# Altium PCB 下板2020-03-20.PCBDOC
Units mm, origin at the board's own origin, x right, y up, seen from the top; angles counter-clockwise.
Board outline 266 x 45 mm, 2 copper layers (Top Layer, Bottom Layer); 7 components, 81 nets, 242 pads, 0 vias.
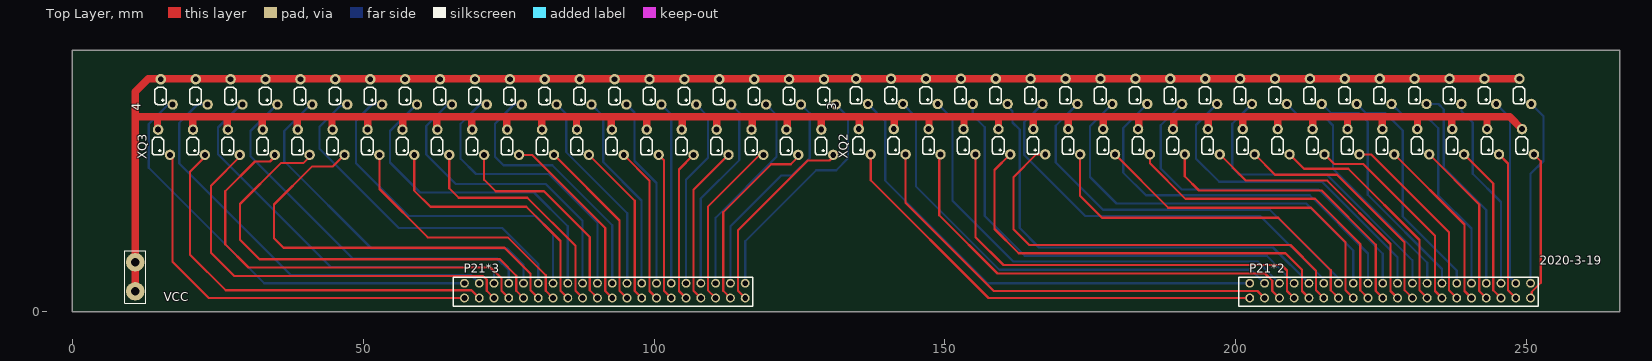
[diagram p0: Top Layer view]
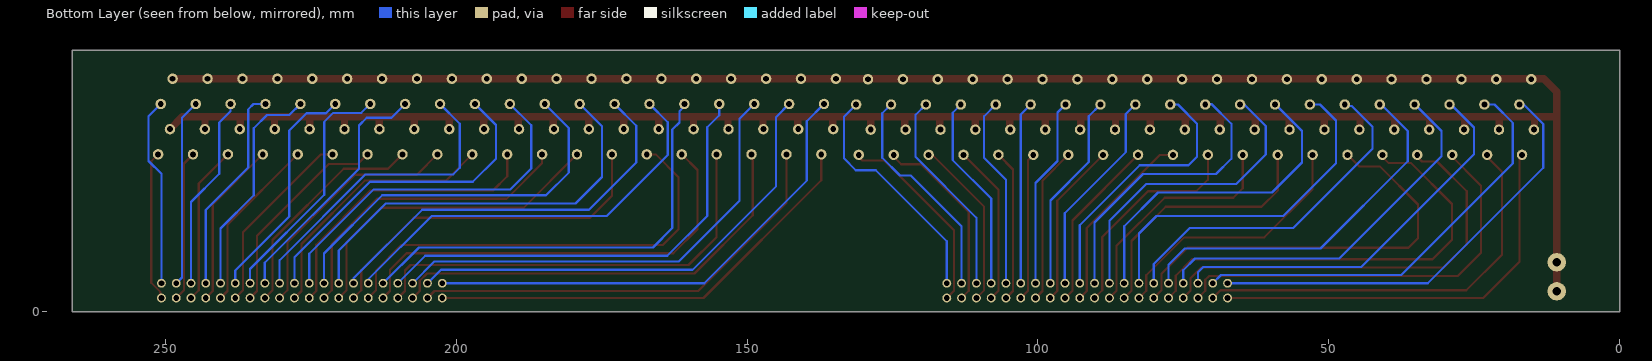
[diagram p1: Bottom Layer view, seen from below]

## Layer stack, top to bottom
Top Solder: solder mask 0.0102, Solder Resist, Dk 3.5
Top Layer: signal copper 0.0356
Dielectric1: dielectric 0.32, FR-4, Dk 4.8
Bottom Layer: signal copper 0.0356
Bottom Solder: solder mask 0.0102, Solder Resist, Dk 3.5

## Board outline
0,0 0,45 266,45 266,0

## Design rules (kind name [scope] priority, off if disabled: settings)
Clearance [All] p1: gap=0.254 ignorepadtopadclearanceinfootprint=FALSE
FabricationTestPointUsage TestPointUsage [All] p1: valid=0 allowmultiple=FALSE
FabricationTestpoint Testpoint [All] p1: side=3 testpointundercomponent=TRUE minsize=1.016 maxsize=2.54 preferedsize=1.524 minholesize=0 maxholesize=1.016 preferedholesize=0.813 testpointgrid=0.025 allowsidetop=TRUE allowsidebottom=TRUE usegrid=TRUE gridtolerance=0
PolygonConnect [All] p1: connectstyle=Relief reliefconductorwidth=0.254 reliefentries=4 polygonreliefangle="90 Angle" airgapwidth=0.254
RoutingVias [All] p1: holewidth=0.8 width=1.6 viastyle="Through Hole" minholewidth=0.711 minwidth=1.27 maxholewidth=0.711 maxwidth=1.27
SilkToSolderMaskClearance SilkscreenOverComponentPads [IsPad] p1: minsilkscreentomaskgap=0.254 clearancetoexposedcopper=TRUE
SolderMaskExpansion [All] p1: expansion=0.102
Width [All] p1: maxlimit=1.27 minlimit=0.254 preferedwidth=0.381 minimp=50.000000 maximp=50.000000 favimp=50.000000
27 further rules are at their usual default settings.

## Classes and differential pairs
component class 盲文原理图1: 1 3 P21*2 XQ2

## Components (designator, comment, footprint, x,y, rotation, side; value= is the part's Value field where it differs from the comment)
3 "Header 20X2" XIANQUAN1 250.769,35.75 r180 top (schematic designator XQ1)
4 "Header 20X2" XIANQUAN1 131.25,35.66 r180 top (schematic designator XQ1)
P21*2 "Header 21X2" XINPIAN 200.5,1 r180 top
P21*3 "Header 21X2" XINPIAN 65.5,1 r180 top (schematic designator P21*2)
XQ2 "Header 20X2" XIANQUAN1 251.229,27.09 r180 top
XQ3 "Header 20X2" XIANQUAN1 130.79,27 r180 top (schematic designator XQ2)
? "" N1A 9,1.5 r0 top

## Footprints (in the part's own frame and the unit in brackets; to place one, negate y for a bottom-side part, rotate by r counter-clockwise, add the part's x,y. Pads: shape width x height; smd on the part's side, far side on the other; paste and mask are expansions set on the pad)
N1A [mm]
  round 3.175 hole 1.5: 1(1.825,2.05) 2(1.825,7.05)
  silkscreen extent 0,0 3.65,9
XIANQUAN1 [mm]
  round 1.8 hole 1: 1(2.04,-4.34) 2(0,0) 3(8.04,-4.34) 4(6,0) 5(14.04,-4.34) 6(12,0) 7(20.04,-4.34) 8(18,0) 9(26.04,-4.34) 10(24,0) 11(32.04,-4.34) 12(30,0) 13(38.04,-4.34) 14(36,0) 15(44.04,-4.34) 16(42,0) 17(50.04,-4.34) 18(48,0) 19(56.04,-4.34) 20(54,0) 21(62.04,-4.34) 22(60,0) 23(68.04,-4.34) 24(66,0) 25(74.04,-4.34) 26(72,0) 27(80.04,-4.34) 28(78,0) 29(86.04,-4.34) 30(84,0) 31(92.04,-4.34) 32(90,0) 33(98.04,-4.34) 34(96,0) 35(104.04,-4.34) 36(102,0) 37(110.04,-4.34) 38(108,0) 39(116.04,-4.34) 40(114,0)
  silkscreen extent 1.08,-3 117.08,0
XINPIAN [mm]
  round 1.524 hole 1: 1(-1.9,-3.94) 2(-4.44,-3.94) 3(-6.98,-3.94) 4(-9.52,-3.94) 5(-12.06,-3.94) 6(-14.6,-3.94) 7(-17.14,-3.94) 8(-19.68,-3.94) 9(-22.22,-3.94) 10(-24.76,-3.94) 11(-27.3,-3.94) 12(-29.84,-3.94) 13(-32.38,-3.94) 14(-34.92,-3.94) 15(-37.46,-3.94) 16(-40,-3.94) 17(-42.54,-3.94) 18(-45.08,-3.94) 19(-47.62,-3.94) 20(-50.16,-3.94) 21(-50.16,-1.4) 22(-47.62,-1.4) 23(-45.08,-1.4) 24(-42.54,-1.4) 25(-40,-1.4) 26(-37.46,-1.4) 27(-34.92,-1.4) 28(-32.38,-1.4) 29(-29.84,-1.4) 30(-27.3,-1.4) 31(-24.76,-1.4) 32(-22.22,-1.4) 33(-19.68,-1.4) 34(-17.14,-1.4) 35(-14.6,-1.4) 36(-12.06,-1.4) 37(-9.52,-1.4) 38(-6.98,-1.4) 39(-4.44,-1.4) 40(-1.9,-1.4)
  silkscreen extent -51.5,-5 0,0

## Part data
3 4 XQ2 XQ3: "Header, 20-Pin, Dual row"
P21*2 P21*3: library part "Header 22X2", "Header, 22-Pin, Dual row"

## Nets (pads, with @x,y where several pads share a name; then routed paths per layer and width w, separated by ;. In a path a pad name is that pad's centre, name@x,y a point inside that pad or via, vN(x,y) a via of type N, cw(c..) or ccw(c..) an arc to the next point about the centre after c; other vN are vias at no path point)
GND: 3.1 3.3 3.5 3.7 3.9 3.11 3.13 3.15 3.17 3.19 3.21 3.23 3.25 3.27 3.29 3.31 3.33 3.35 3.37 3.39 4.1 4.3 4.5 4.7 4.9 4.11 4.13 4.15 4.17 4.19 4.21 4.23 4.25 4.27 4.29 4.31 4.33 4.35 4.37 4.39 ?.1 ?.2 XQ2.1 XQ2.3 XQ2.5 XQ2.7 XQ2.9 XQ2.11 XQ2.13 XQ2.15 XQ2.17 XQ2.19 XQ2.21 XQ2.23 XQ2.25 XQ2.27 XQ2.29 XQ2.31 XQ2.33 XQ2.35 XQ2.37 XQ2.39 XQ3.1 XQ3.3 XQ3.5 XQ3.7 XQ3.9 XQ3.11 XQ3.13 XQ3.15 XQ3.17 XQ3.19 XQ3.21 XQ3.23 XQ3.25 XQ3.27 XQ3.29 XQ3.31 XQ3.33 XQ3.35 XQ3.37 XQ3.39 | length 598.3
  Top Layer w1.27: ?.1 ?.2 10.825,33.2 ; XQ3.39 14.649,31.441 14.649,33.55 ; XQ3.37 20.675,31.415 20.675,33.55 ; XQ3.35 26.649,31.441 26.649,33.501 26.6,33.55 ; XQ3.33 32.649,31.441 32.649,33.326 32.425,33.55 ; XQ3.31 38.649,31.441 38.649,33.501 38.6,33.55 ; XQ3.29 44.649,31.441 44.649,33.426 44.525,33.55 ; XQ3.27 50.775,31.365 50.775,33.55 ; XQ3.25 56.8,31.39 56.8,33.55 ; XQ3.23 62.649,31.441 62.649,33.451 62.55,33.55 ; XQ3.21 68.65,31.44 68.65,33.55 ; XQ3.19 74.649,31.441 74.649,33.301 74.4,33.55 ; XQ3.17 80.7,31.39 80.7,33.55 ; XQ3.15 86.675,31.415 86.675,33.55 ; XQ3.13 92.649,31.441 92.649,33.501 92.6,33.55 ; XQ3.11 98.75,33.55 ; XQ3.9 104.852,31.441 104.852,33.477 104.925,33.55 ; XQ3.7 110.75,33.55 ; XQ3.5 116.852,31.441 116.852,33.55 ; XQ3.3 122.875,31.465 122.875,33.55 ; 128.675,33.55 122.875,33.55 ; XQ3.1 128.75,33.55 135.275,33.55 ; XQ2.39 135.275,31.516 135.275,33.55 ; XQ2.37 141.275,31.516 141.275,33.55 ; XQ2.35 147.25,31.491 147.25,33.55 ; XQ2.33 153.275,31.516 153.275,33.55 ; XQ2.31 159.2,31.441 159.2,33.55 ; XQ2.29 165.189,33.514 165.225,33.55 ; XQ2.27 171.189,33.536 171.175,33.55 ; XQ2.25 177.189,33.539 177.2,33.55 ; XQ2.23 183.3,31.541 183.3,33.55 ; XQ2.21 189.325,31.566 189.325,33.55 ; XQ2.19 195.25,31.491 195.25,33.55 ; XQ2.17 201.2,31.441 201.2,33.55 ; XQ2.15 207.189,33.511 207.15,33.55 ; XQ2.13 213.189,33.536 213.175,33.55 ; XQ2.11 219.189,33.514 219.225,33.55 ; XQ2.9 225.189,33.536 225.175,33.55 ; XQ2.7 231.225,31.466 231.225,33.55 ; XQ2.5 237.125,31.494 237.125,33.55 ; XQ2.3 243.175,31.444 243.175,33.55 ; 3.1 3.3 3.5 3.7 3.9 3.11 3.13 3.15 3.17 3.19 3.21 3.23 3.25 3.27 3.29 3.31 3.33 3.35 3.37 3.39 129.21,40.09 123.21,40.09 117.21,40.09 111.21,40.09 105.21,40.09 99.21,40.09 93.21,40.09 87.21,40.09 81.21,40.09 75.21,40.09 69.21,40.09 63.21,40.09 57.21,40.09 51.21,40.09 45.21,40.09 39.21,40.09 33.21,40.09 27.21,40.09 21.21,40.09 15.21,40.09 13.04,40.09 10.825,37.875 10.825,33.2 ; XQ2.1 247.069,33.55 243.175,33.55 ; 10.825,33.2 11.175,33.55 14.649,33.55 ; 14.649,33.55 20.675,33.55 ; 20.675,33.55 26.6,33.55 ; 26.6,33.55 32.425,33.55 ; 32.425,33.55 38.6,33.55 ; 38.6,33.55 44.525,33.55 ; 44.525,33.55 50.775,33.55 ; 50.775,33.55 56.8,33.55 ; 56.8,33.55 62.55,33.55 ; 62.55,33.55 68.65,33.55 ; 68.65,33.55 74.4,33.55 ; 74.4,33.55 80.7,33.55 ; 80.7,33.55 86.675,33.55 ; 86.675,33.55 92.6,33.55 ; 92.6,33.55 98.75,33.55 ; 98.75,33.55 104.925,33.55 ; 104.925,33.55 110.75,33.55 ; 110.75,33.55 116.852,33.55 ; 116.852,33.55 122.875,33.55 ; 135.275,33.55 141.275,33.55 ; 141.275,33.55 147.25,33.55 ; 147.25,33.55 153.275,33.55 ; 153.275,33.55 159.2,33.55 ; 159.2,33.55 165.225,33.55 ; 165.225,33.55 171.175,33.55 ; 171.175,33.55 177.2,33.55 ; 177.2,33.55 183.3,33.55 ; 183.3,33.55 189.325,33.55 ; 189.325,33.55 195.25,33.55 ; 195.25,33.55 201.2,33.55 ; 201.2,33.55 207.15,33.55 ; 207.15,33.55 213.175,33.55 ; 213.175,33.55 219.225,33.55 ; 219.225,33.55 225.175,33.55 ; 225.175,33.55 231.225,33.55 ; 231.225,33.55 237.125,33.55 ; 237.125,33.55 243.175,33.55
XQ1_1: 4.2 P21*3.20 | length 40.9
  Bottom Layer w0.381: P21*3.20 115.66,12.16 127.875,24.375 131.325,24.375 133.35,26.4 133.35,33.56 4.2
XQ1_2: 4.4 P21*3.19 | length 38.1
  Bottom Layer w0.381: P21*3.19 113.12,14.72 121.875,23.475 123.725,23.475 126.75,26.5 126.75,34.16 4.4
XQ1_3: 4.6 P21*3.18 | length 35.8
  Bottom Layer w0.381: P21*3.18 110.58,16.205 121.025,26.65 121.025,33.885 4.6
XQ1_4: 4.8 P21*3.17 | length 34
  Bottom Layer w0.381: P21*3.17 108.04,19.49 114.65,26.1 114.65,34.26 4.8
XQ1_5: 4.10 P21*3.16 | length 33.1
  Bottom Layer w0.381: P21*3.16 105.5,22.725 109.25,26.475 109.25,33.66 4.10
XQ1_6: 4.12 P21*3.15 | length 31.4
  Bottom Layer w0.381: 4.12 102.96,33.95 P21*3.15
XQ1_7: 4.14 P21*3.14 | length 32.9
  Bottom Layer w0.381: 4.14 96.625,34.285 96.625,25.95 100.42,22.155 P21*3.14
XQ1_8: 4.16 P21*3.13 | length 34.3
  Bottom Layer w0.381: 4.16 91.25,33.66 91.25,25.775 97.85,19.175 97.85,4.97 P21*3.13
XQ1_9: 4.18 P21*3.12 | length 35.8
  Bottom Layer w0.381: 4.18 84.9,34.01 84.9,27.475 95.4,16.975 95.4,5 P21*3.12
XQ1_10: 4.20 P21*3.11 | length 46.6
  Bottom Layer w0.381: 4.20 75.935,35.66 72.65,32.375 72.65,26.7 74.125,25.225 82.5,25.225 92.8,14.925 P21*3.11
XQ1_11: 4.22 P21*3.10 | length 49.9
  Bottom Layer w0.381: 4.22@70.769,35.75 70.15,35.75 66.75,32.35 66.75,26.325 69.375,23.7 81.95,23.7 90.26,15.39 P21*3.10
XQ1_12: 4.24 P21*3.9 | length 53.1
  Bottom Layer w0.381: 4.24 64.56,35.66 60.85,31.95 60.85,27.05 65.9,22 81.375,22 87.72,15.655 P21*3.9
XQ1_13: 4.26 P21*3.8 | length 56.8
  Bottom Layer w0.381: 4.26 59.169,35.66 54.625,31.116 54.625,25.675 59.75,20.55 79.375,20.55 85.18,14.745 P21*3.8
XQ1_14: 4.28 P21*3.7 | length 60.4
  Bottom Layer w0.381: 4.28 51.51,35.66 48.775,32.925 48.775,25.575 57.85,16.5 79.625,16.5 82.64,13.485 P21*3.7
XQ1_15: 4.30 P21*3.6 | length 59.3
  Bottom Layer w0.381: 4.30 46.979,35.388 46.038,35.388 42.475,31.825 42.475,28.075 56.1,14.45 73.9,14.45 80.1,8.25 P21*3.6
XQ1_16: 4.32 P21*3.5 | length 63.6
  Bottom Layer w0.381: 4.32 40.985,35.66 36.425,31.1 36.425,25.925 51.425,10.925 74.775,10.925 77.56,8.14 P21*3.5
XQ1_17: 4.34 P21*3.4 | length 65.6
  Bottom Layer w0.381: 4.34 35.169,35.66 30.625,31.116 30.625,26.75 48.2,9.175 73,9.175 75.02,7.155 P21*3.4
XQ1_18: 4.36 P21*3.3 | length 68.2
  Bottom Layer w0.381: 4.36 29.01,35.66 25.05,31.7 25.05,27.1 44.425,7.725 71.6,7.725 72.48,6.845 P21*3.3
XQ1_19: 4.38 P21*3.2 | length 73.3
  Bottom Layer w0.381: 4.38 21.535,35.66 18.375,32.5 18.375,25.525 37.55,6.35 68.53,6.35 P21*3.2
XQ1_20: 4.40 P21*3.1 | length 75.5
  Bottom Layer w0.381: 4.40 16.485,35.66 13.15,32.325 13.15,24.8 33.01,4.94 P21*3.1
XQ2_1: P21*3.21 XQ3.2 | length 34.4
  Top Layer w0.381: P21*3.21 114.425,3.635 114.425,14.025 126.425,26.025 130.164,26.025 XQ3.2@131.229,27.09
XQ2_2: P21*3.22 XQ3.4 | length 32.7
  Top Layer w0.381: P21*3.22 111.875,3.645 111.875,17.125 120.125,25.375 123.514,25.375 XQ3.4@125.229,27.09
XQ2_3: P21*3.23 XQ3.6 | length 29.5
  Top Layer w0.381: P21*3.23 109.25,3.73 109.25,18.1 118.15,27 XQ3.6
XQ2_4: P21*3.24 XQ3.8 | length 27.6
  Top Layer w0.381: P21*3.24 106.79,3.65 106.79,21 XQ3.8
XQ2_5: P21*3.25 XQ3.10 | length 26.3
  Top Layer w0.381: P21*3.25 104.294,3.607 104.294,24.503 XQ3.10 ; XQ3.10@107.125,26.986 XQ3.10@107.229,27.09
XQ2_6: P21*3.26 XQ3.12 | length 25.5
  Top Layer w0.381: XQ3.12 101.7,26.09 101.7,3.66 P21*3.26
XQ2_7: P21*3.27 XQ3.14 | length 26.9
  Top Layer w0.381: XQ3.14 99.214,22.577 99.214,3.607 P21*3.27
XQ2_8: P21*3.28 XQ3.16 | length 28.4
  Top Layer w0.381: XQ3.16 96.674,19.117 96.674,3.607 P21*3.28
XQ2_9: P21*3.29 XQ3.18 | length 29.8
  Top Layer w0.381: XQ3.18 94.075,15.715 94.075,3.665 P21*3.29
XQ2_10: P21*3.30 XQ3.20 | length 32.5
  Top Layer w0.381: XQ3.20 79.025,27 91.594,14.431 91.594,3.607 P21*3.30
XQ2_11: P21*3.31 XQ3.22 | length 37.5
  Top Layer w0.381: XQ3.22 70.79,22.735 72.775,20.75 81.075,20.75 88.927,12.898 88.927,3.734 P21*3.31
XQ2_12: P21*3.32 XQ3.24 | length 41
  Top Layer w0.381: XQ3.24 64.79,21.26 66.425,19.625 78.225,19.625 86.514,11.336 86.514,3.607 P21*3.32
XQ2_13: P21*3.33 XQ3.26 | length 45.2
  Top Layer w0.381: XQ3.26 58.79,20.86 61.575,18.075 78.025,18.075 83.914,12.186 83.914,3.666 P21*3.33
XQ2_14: P21*3.34 XQ3.28 | length 45
  Top Layer w0.381: XQ3.28 52.79,21.135 61.1,12.825 74.85,12.825 81.374,6.301 81.374,3.666 P21*3.34
XQ2_15: P21*3.35 XQ3.30 | length 72.8
  Top Layer w0.381: XQ3.30 44.815,25.025 41.225,25.025 34.675,18.475 34.675,12.65 36.3,11.025 74.3,11.025 78.775,6.55 78.775,3.725 P21*3.35
XQ2_16: P21*3.36 XQ3.32 | length 76.5
  Top Layer w0.381: XQ3.32@41.229,27.09 39.764,25.625 35.9,25.625 28.825,18.55 28.825,12.4 32.175,9.05 73.5,9.05 76.308,6.242 76.308,3.652 P21*3.36
XQ2_17: P21*3.37 XQ3.34 | length 74.5
  Top Layer w0.381: XQ3.34@35.229,27.09 33.989,25.85 31.4,25.85 26.3,20.75 26.3,11.65 30.3,7.65 71.9,7.65 73.775,5.775 73.775,3.645 P21*3.37
XQ2_18: P21*3.38 XQ3.36 | length 72.1
  Top Layer w0.381: XQ3.36@29.229,27.09 23.85,21.711 23.85,10.2 27.85,6.2 70.575,6.2 71.229,5.546 71.229,3.651 P21*3.38
XQ2_19: P21*3.39 XQ3.38 | length 71.2
  Top Layer w0.381: XQ3.38@23.229,27.09 20.25,24.111 20.25,9.85 26.375,3.725 68.615,3.725 P21*3.39
XQ2_20: P21*3.40 XQ3.40 | length 71.2
  Top Layer w0.381: XQ3.40@17.229,27.09 17.229,8.646 23.475,2.4 P21*3.40
XQ3_1: P21*2.21 XQ2.2 | length 25.9
  Top Layer w0.381: P21*2.21 250.879,2.619 250.879,3.452 252.425,4.999 252.425,25.894 XQ2.2
XQ3_2: P21*2.22 XQ2.4 | length 25.9
  Top Layer w0.381: XQ2.4 246.787,25.533 246.787,3.734 P21*2.22
XQ3_3: P21*2.23 XQ2.6 | length 27.3
  Top Layer w0.381: XQ2.6 244.25,22.069 244.25,3.73 P21*2.23
XQ3_4: P21*2.24 XQ2.8 | length 28.8
  Top Layer w0.381: XQ2.8 241.834,18.486 241.834,3.607 P21*2.24
XQ3_5: P21*2.25 XQ2.10 | length 30.2
  Top Layer w0.381: XQ2.10 239.294,15.026 239.294,3.607 P21*2.25
XQ3_6: P21*2.26 XQ2.12 | length 32.8
  Top Layer w0.381: XQ2.12 223.235,27.09 236.627,13.698 236.627,3.734 P21*2.26
XQ3_7: P21*2.27 XQ2.14 | length 36
  Top Layer w0.381: XQ2.14 216.894,25.425 221.875,25.425 234.214,13.086 234.214,3.607 P21*2.27
XQ3_8: P21*2.28 XQ2.16 | length 38.9
  Top Layer w0.381: XQ2.16 211.719,24.6 219.325,24.6 231.55,12.375 231.55,3.73 P21*2.28
XQ3_9: P21*2.29 XQ2.18 | length 42.1
  Top Layer w0.381: XQ2.18 206.744,23.575 217.375,23.575 229.007,11.943 229.007,3.734 P21*2.29
XQ3_10: P21*2.30 XQ2.20 | length 45.5
  Top Layer w0.381: XQ2.20 201.744,22.575 215.7,22.575 226.594,11.681 226.594,3.607 P21*2.30
XQ3_11: P21*2.31 XQ2.22 | length 51.1
  Top Layer w0.381: XQ2.22 191.229,23.321 193.675,20.875 214.75,20.875 224.054,11.571 224.054,3.607 P21*2.31
XQ3_12: P21*2.32 XQ2.24 | length 53.3
  Top Layer w0.381: XQ2.24 185.229,25.546 191.325,19.45 213.625,19.45 221.387,11.688 221.387,3.734 P21*2.32
XQ3_13: P21*2.33 XQ2.26 | length 56
  Top Layer w0.381: XQ2.26 188.394,17.925 212.925,17.925 218.847,12.003 218.847,3.734 P21*2.33
XQ3_14: P21*2.34 XQ2.28 | length 60.8
  Top Layer w0.381: XQ2.28 173.229,19.946 176.975,16.2 207.3,16.2 216.307,7.193 216.307,3.734 P21*2.34
XQ3_15: P21*2.35 XQ2.30 | length 76.2
  Top Layer w0.381: XQ2.30 165.69,27.09 161.775,23.175 161.775,14.198 164.473,11.5 209.375,11.5 213.767,7.108 213.767,3.734 P21*2.35
XQ3_16: P21*2.36 XQ2.32 | length 75
  Top Layer w0.381: XQ2.32 158.525,24.386 158.525,14.25 162.7,10.075 208.525,10.075 211.354,7.247 211.354,3.607 P21*2.36
XQ3_17: P21*2.37 XQ2.34 | length 75.4
  Top Layer w0.381: XQ2.34 155.229,12.896 160.05,8.075 207.85,8.075 208.8,7.125 208.8,3.62 P21*2.37
XQ3_18: P21*2.38 XQ2.36 | length 75.9
  Top Layer w0.381: XQ2.36 149.025,26.886 149.025,16.625 159.025,6.625 205.025,6.625 206.274,5.376 206.274,3.607 P21*2.38
XQ3_19: P21*2.39 XQ2.38 | length 76.8
  Top Layer w0.381: XQ2.38 143.229,18.771 158.393,3.607 203.734,3.607 P21*2.39
XQ3_20: P21*2.40 XQ2.40 | length 78
  Top Layer w0.381: XQ2.40 137.229,22.646 157.475,2.4 P21*2.40
XQ4_1: 3.2 P21*2.20 | length 32.6
  Bottom Layer w0.381: P21*2.20 250.66,23.735 252.875,25.95 252.875,33.644 3.2
XQ4_2: 3.4 P21*2.19 | length 32.2
  Bottom Layer w0.381: 3.4 247.125,33.394 247.125,5.935 P21*2.19
XQ4_3: 3.6 P21*2.18 | length 33.6
  Bottom Layer w0.381: 3.6 238.769,34.506 240.725,32.55 240.725,23.775 245.58,18.92 P21*2.18
XQ4_4: 3.8 P21*2.17 | length 36.3
  Bottom Layer w0.381: 3.8 234.825,35.75 235.75,34.825 235.75,24.832 243.04,17.542 P21*2.17
XQ4_5: 3.10 P21*2.16 | length 38.8
  Bottom Layer w0.381: 3.10 228.669,33.85 232.525,33.85 234.8,31.575 234.8,20.05 240.5,14.35 P21*2.16
XQ4_6: 3.12 P21*2.15 | length 39.9
  Bottom Layer w0.381: 3.12 222.369,34.15 225.725,34.15 228.675,31.2 228.675,16.425 237.96,7.14 P21*2.15
XQ4_7: 3.14 P21*2.14 | length 42.2
  Bottom Layer w0.381: 3.14 216.298,34.221 221.129,34.221 222.675,32.675 222.675,20.125 235.42,7.38 P21*2.14
XQ4_8: 3.16 P21*2.13 | length 43.3
  Bottom Layer w0.381: 3.16 211.119,33.4 215.35,33.4 216.715,32.035 216.715,24.635 232.88,8.47 P21*2.13
XQ4_9: 3.18 P21*2.12 | length 54.2
  Bottom Layer w0.381: 3.18@203.121,35.75 3.18 199.375,32.356 199.375,24.775 200.5,23.65 215.575,23.65 230.34,8.885 P21*2.12
XQ4_10: 3.20 P21*2.11 | length 57
  Bottom Layer w0.381: 3.20 193.15,32.131 193.15,26.35 197.125,22.375 214.825,22.375 227.8,9.4 P21*2.11
XQ4_11: 3.22 P21*2.10 | length 61.9
  Bottom Layer w0.381: 3.22 187.1,32.081 187.1,24.65 190.675,21.075 214.175,21.075 225.26,9.99 P21*2.10
XQ4_12: 3.24 P21*2.9 | length 66.4
  Bottom Layer w0.381: 3.24 180.65,31.631 180.65,23.95 184.55,20.05 212.725,20.05 222.72,10.055 P21*2.9
XQ4_13: 3.26 P21*2.8 | length 70.3
  Bottom Layer w0.381: 3.26 174.919,31.9 174.919,23.206 179.475,18.65 212.1,18.65 220.18,10.57 P21*2.8
XQ4_14: 3.28 P21*2.7 | length 69.3
  Bottom Layer w0.381: 3.28 169.025,32.006 169.025,25.7 177.15,17.575 205.85,17.575 217.64,5.785 P21*2.7
XQ4_15: 3.30 P21*2.6 | length 71.1
  Bottom Layer w0.381: 3.30 163.625,32.606 163.625,26.975 174.1,16.5 204.2,16.5 215.1,5.6 P21*2.6
XQ4_16: 3.32 P21*2.5 | length 75.8
  Bottom Layer w0.381: 3.32 160.769,35.38 161.625,34.525 161.625,32.575 162.85,31.35 162.85,14.425 166.175,11.1 206.4,11.1 P21*2.5
XQ4_17: 3.34 P21*2.4 | length 78.1
  Bottom Layer w0.381: 3.34 154.769,33.831 156.85,31.75 156.85,16.5 163.7,9.65 205.31,9.65 P21*2.4
XQ4_18: 3.36 P21*2.3 | length 79.7
  Bottom Layer w0.381: 3.36 151.3,33.219 151.3,19.125 161.75,8.675 203.745,8.675 P21*2.3
XQ4_19: 3.38 P21*2.2 | length 81.9
  Bottom Layer w0.381: 3.38 145,33.519 145,21.625 159.35,7.275 202.605,7.275 P21*2.2
XQ4_20: 3.40 P21*2.1 | length 84.4
  Bottom Layer w0.381: 3.40 139.725,32.794 139.725,22.575 157.36,4.94 P21*2.1

## Keep-outs
Keep-Out Layer:
  lines w0.254: -0.021,44.899 -0.019,44.9

## Silkscreen, mask and mechanical layers (free items; w line width, h text height)
Top Overlay:
  text "2020-3-19" at 252.25,8.15 h1.52
  text "VCC" at 15.679,1.825 h1.52
Mechanical 1:
  circle w0.254: c213,14 r1.75
  circle w0.254: c188,14 r1.75
  circle w0.254: c142,14 r1.75
  circle w0.254: c133,14 r1.75
  circle w0.254: c260.5,39 r1.5
  circle w0.254: c260.5,33.5 r1.5
  circle w0.254: c260.5,28 r1.5
  circle w0.254: c5.5,28 r1.5
  circle w0.254: c134.75,36 r0.65
  circle w0.254: c191.25,31 r0.65
  circle w0.254: c188.75,36 r0.65
  circle w0.254: c194.75,36 r0.65
  circle w0.254: c197.25,31 r0.65
  circle w0.254: c200.75,36 r0.65
  circle w0.254: c203.25,31 r0.65
  circle w0.254: c206.75,36 r0.65
  circle w0.254: c209.25,31 r0.65
  circle w0.254: c212.75,36 r0.65
  circle w0.254: c215.25,31 r0.65
  circle w0.254: c218.75,36 r0.65
  circle w0.254: c221.25,31 r0.65
  circle w0.254: c227.25,31 r0.65
  circle w0.254: c230.75,36 r0.65
  circle w0.254: c233.25,31 r0.65
  circle w0.254: c236.75,36 r0.65
  circle w0.254: c239.25,31 r0.65
  circle w0.254: c242.75,36 r0.65
  circle w0.254: c245.25,31 r0.65
  circle w0.254: c248.75,36 r0.65
  circle w0.254: c251.25,31 r0.65
  circle w0.254: c182.75,36 r0.65
  circle w0.254: c185.25,31 r0.65
  circle w0.254: c176.75,36 r0.65
  circle w0.254: c179.25,31 r0.65
  circle w0.254: c170.75,36 r0.65
  circle w0.254: c173.25,31 r0.65
  circle w0.254: c164.75,36 r0.65
  circle w0.254: c167.25,31 r0.65
  circle w0.254: c161.25,31 r0.65
  circle w0.254: c152.75,36 r0.65
  circle w0.254: c155.25,31 r0.65
  circle w0.254: c146.75,36 r0.65
  circle w0.254: c149.25,31 r0.65
  circle w0.254: c140.75,36 r0.65
  circle w0.254: c143.25,31 r0.65
  circle w0.254: c137.25,31 r0.65
  circle w0.254: c158.75,36 r0.65
  circle w0.254: c224.75,36 r0.65
  circle w0.254: c104.75,36 r0.65
  circle w0.254: c38.75,36 r0.65
  circle w0.254: c17.25,31 r0.65
  circle w0.254: c23.25,31 r0.65
  circle w0.254: c20.75,36 r0.65
  circle w0.254: c29.25,31 r0.65
  circle w0.254: c26.75,36 r0.65
  circle w0.254: c35.25,31 r0.65
  circle w0.254: c32.75,36 r0.65
  circle w0.254: c41.25,31 r0.65
  circle w0.254: c47.25,31 r0.65
  circle w0.254: c44.75,36 r0.65
  circle w0.254: c53.25,31 r0.65
  circle w0.254: c50.75,36 r0.65
  circle w0.254: c59.25,31 r0.65
  circle w0.254: c56.75,36 r0.65
  circle w0.254: c65.25,31 r0.65
  circle w0.254: c62.75,36 r0.65
  circle w0.254: c131.25,31 r0.65
  circle w0.254: c128.75,36 r0.65
  circle w0.254: c125.25,31 r0.65
  circle w0.254: c122.75,36 r0.65
  circle w0.254: c119.25,31 r0.65
  circle w0.254: c116.75,36 r0.65
  circle w0.254: c113.25,31 r0.65
  circle w0.254: c110.75,36 r0.65
  circle w0.254: c107.25,31 r0.65
  circle w0.254: c101.25,31 r0.65
  circle w0.254: c98.75,36 r0.65
  circle w0.254: c95.25,31 r0.65
  circle w0.254: c92.75,36 r0.65
  circle w0.254: c89.25,31 r0.65
  circle w0.254: c86.75,36 r0.65
  circle w0.254: c83.25,31 r0.65
  circle w0.254: c80.75,36 r0.65
  circle w0.254: c77.25,31 r0.65
  circle w0.254: c74.75,36 r0.65
  circle w0.254: c68.75,36 r0.65
  circle w0.254: c71.25,31 r0.65
  circle w0.254: c14.75,36 r0.65
  circle w0.254: c5.5,33.5 r1.5
  circle w0.254: c5.5,39 r1.5
  circle w0.254: c78,14 r1.75
  circle w0.254: c53,14 r1.75
  circle w0.254: c133,7.5 r4
  circle w0.254: c124,14 r1.75
  lines w0.3: 0,0 0,45 266,45 266,0 0,0